# Altium PCB PCBAmpli.PcbDoc
Units mil, origin at the board's own origin, x right, y up, seen from the top; angles counter-clockwise.
Board outline 4500 x 2200 mil, 2 copper layers (Top Layer, Bottom Layer); 43 components, 19 nets, 102 pads, 0 vias.
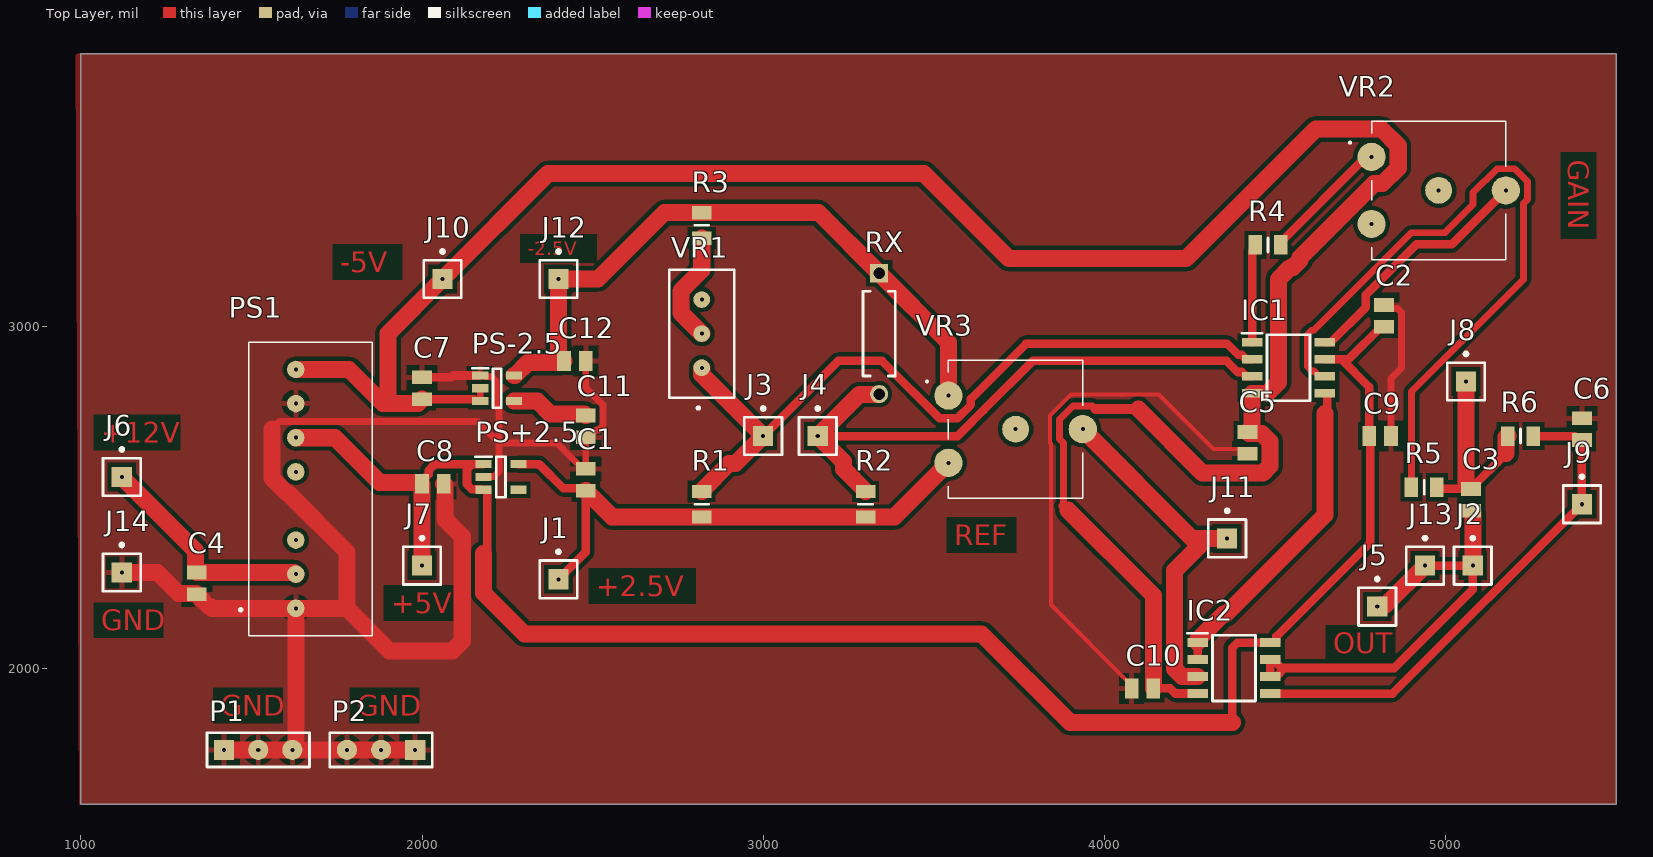
[diagram p0: Top Layer view]
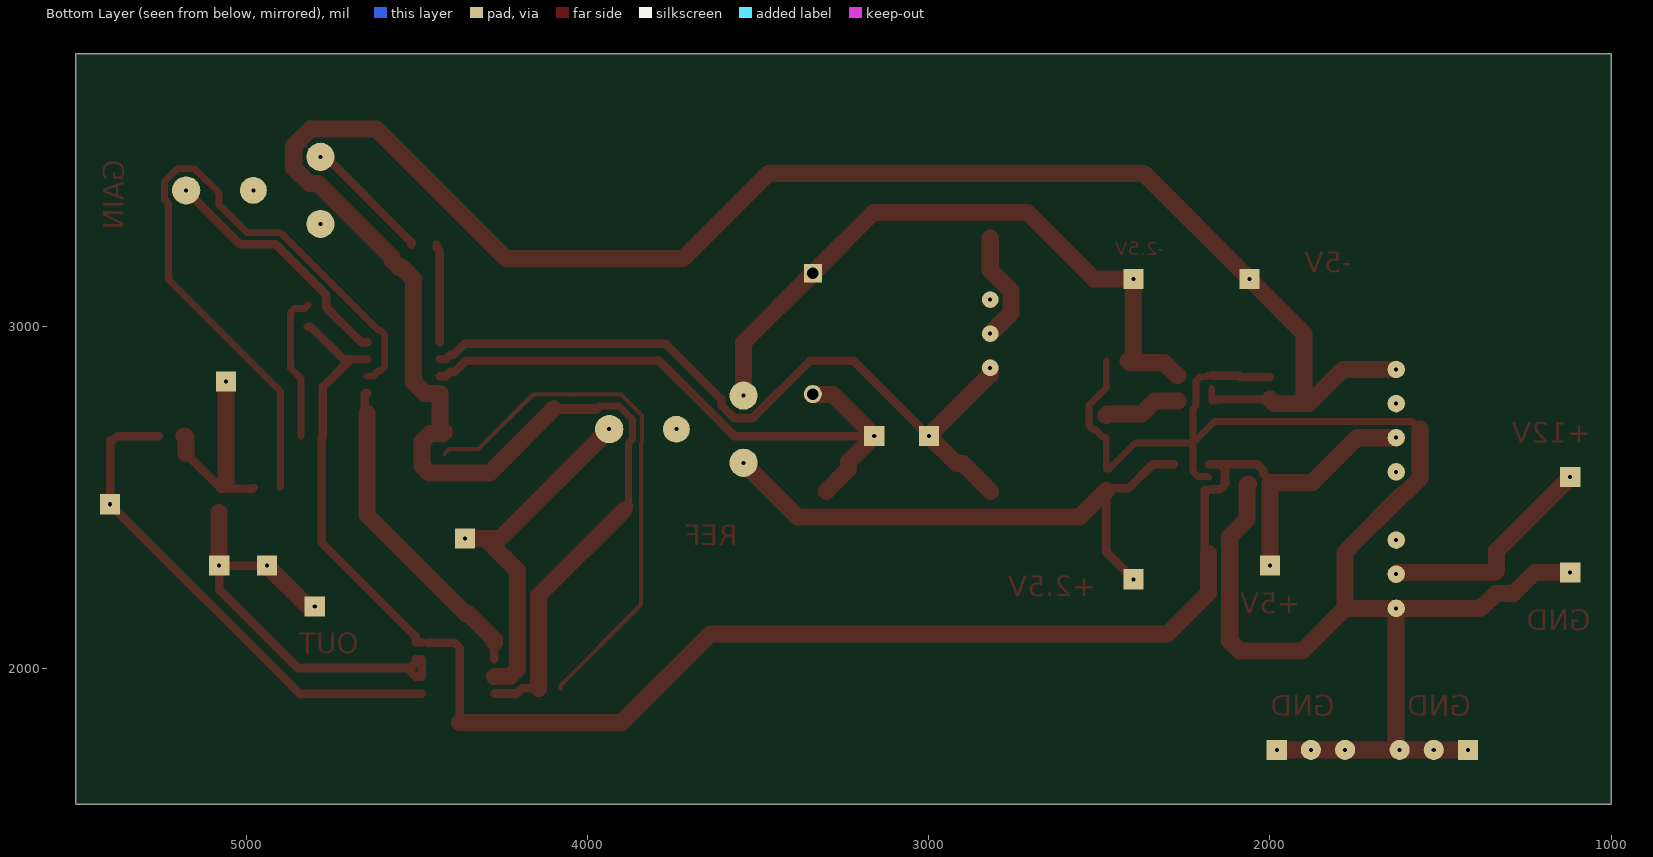
[diagram p1: Bottom Layer view, seen from below]
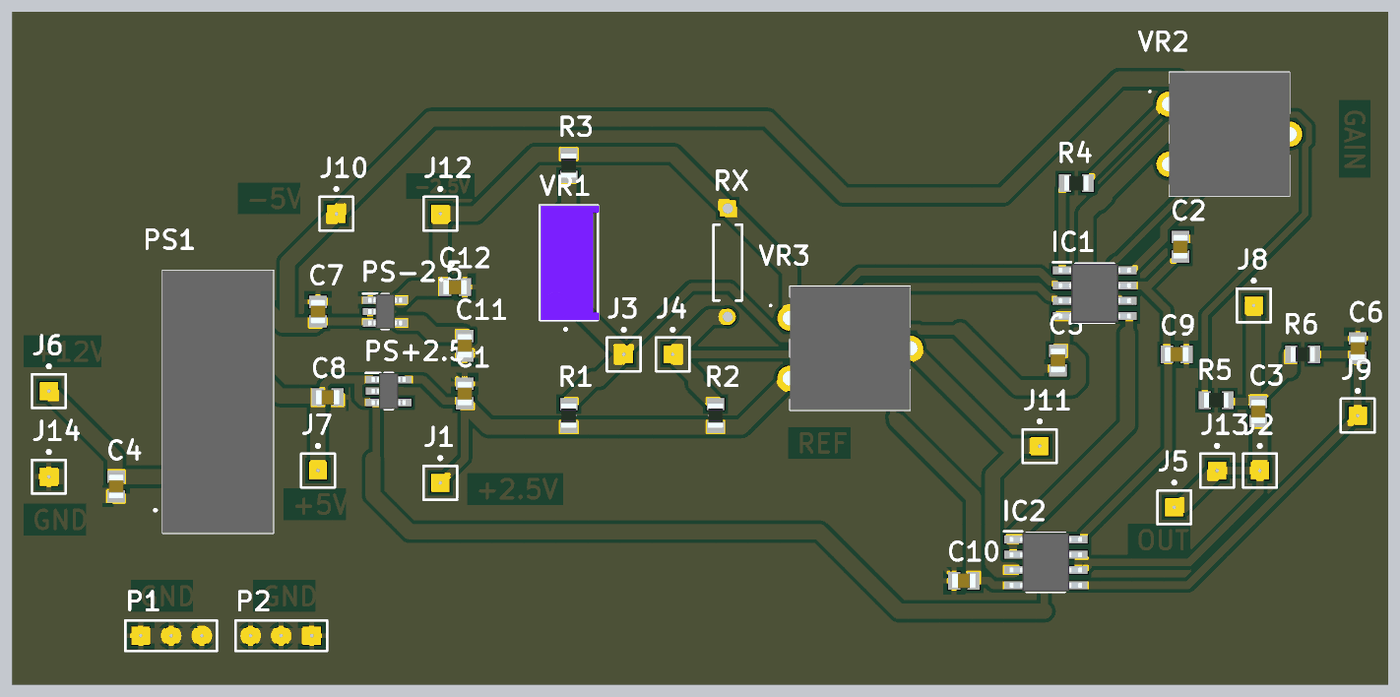
[diagram p2: 3D render of the assembled board from above, using the file's embedded part models]

## Layer stack, top to bottom
Top Solder: solder mask 0.4, Solder Resist, Dk 3.5
Top Layer: signal copper 1.4
Dielectric 1: dielectric 12.6, FR-4, Dk 4.8
Bottom Layer: signal copper 1.4
Bottom Solder: solder mask 0.4, Solder Resist, Dk 3.5

## Board outline
1000,1600 5500,1600 5500,3800 1000,3800

## Design rules (kind name [scope] priority, off if disabled: settings)
Clearance [All] p1: gap=12 ignorepadtopadclearanceinfootprint=FALSE
PlaneConnect [All] p1: planeconnectstyle=Relief reliefexpansion=20 reliefentries=4 reliefconductorwidth=16 reliefairgap=16
PolygonConnect [All] p1: connectstyle=Relief reliefconductorwidth=16 reliefentries=4 polygonreliefangle="90 Angle" airgapwidth=16
RoutingVias [All] p1: holewidth=28 width=50 viastyle="Through Hole" minholewidth=28 minwidth=50 maxholewidth=28 maxwidth=50
SolderMaskExpansion [All] p1: expansion=4 istentingtop=FALSE
Width [All] p1: maxlimit=100 minlimit=10 preferedwidth=25 minimp=50.000000 maximp=50.000000 favimp=50.000000
29 further rules are at their usual default settings.

## Components (designator, comment, footprint, x,y, rotation, side; value= is the part's Value field where it differs from the comment)
C1 "1uF" CAPC2012X94N 2480,2551.89 r270 top
C2 "100nF" CAPC2012X94N 4820,3031.89 r270 top
C3 "330nF" CAPC2012X94N 5075,2493.11 r90 top
C4 "1uF" CAPC2012X94N 1340,2248.11 r270 top
C5 "100nF" CAPC2012X94N 4420,2660 r270 top
C6 "680nF" CAPC2012X94N 5400,2700 r270 top
C7 "2.2uF" CAPC2012X94N 2000,2820 r270 top
C8 "1uF" CAPC2012X94N 2031.89,2540 r180 top
C9 "100nF" CAPC2012X94N 4808.11,2680 r180 top
C10 "100nF" CAPC2012X94N 4111.89,1940 r180 top
C11 "10nF" CAPC2012X94N 2480,2708.11 r90 top
C12 "2.2uF" CAPC2012X94N 2448.11,2900 r180 top
IC1 "AD620ARZ-REEL" SOIC127P600X175-8N 4540,2880 r0 top
IC2 "LM258D" SOIC127P600X175-8N 4380,2000 r0 top
J1 "Socket" PIN1 2400,2260 r0 top
J2 "Socket" PIN1 5080,2300 r0 top
J3 "Socket" PIN1 3000,2680 r0 top
J4 "Socket" PIN1 3160,2680 r0 top
J5 "Socket" PIN1 4800,2180 r0 top
J6 "Socket" PIN1 1120,2560 r0 top
J7 "Socket" PIN1 2000,2300 r0 top
J8 "Socket" PIN1 5060,2840 r0 top
J9 "Socket" PIN1 5400,2480 r0 top
J10 "Socket" PIN1 2060,3140 r0 top
J11 "Socket" PIN1 4360,2380 r0 top
J12 "Socket" PIN1 2400,3140 r0 top
J13 "Socket" PIN1 4940,2300 r0 top
J14 "Socket" PIN1 1120,2280 r0 top
P1 "Header 3" HDR1X3 1420,1760 r0 top
P2 "Header 3" HDR1X3 1980,1760 r180 top
PS1 "IZ1205S" IZ1205S 1630,2175 r90 top
PS+2.5 "AP7331-25WG-7" SOT95P285X130-5N 2231.18,2560 r0 top
PS-2.5 "TPS72325DBVT" SOT95P280X145-5N 2220,2820 r0 top
R1 "120R" RESC2012X65N 2820,2480 r270 top
R2 "120R" RESC2012X65N 3300,2480 r270 top
R3 "115R" RESC2012X65N 2820,3297.4 r270 top
R4 "100R" RESC2012X65N 4480,3240 r0 top
R5 "2800" RESC2012X65N 4937.6,2530 r180 top
R6 "4000" RESC2012X65N 5220,2680 r180 top
RX "" RESA60-630X240 3340,2980 r270 top value=StrainGaugePins
VR1 "Pot_10R" 3296W-1 2820,2980 r90 top
VR2 "220R" PT10LV10473A2020PMS 4783.15,3498.43 r270 top
VR3 "" PT10LV10473A2020PMS 3543.15,2798.43 r270 top

## Footprints (in the part's own frame and the unit in brackets; to place one, negate y for a bottom-side part, rotate by r counter-clockwise, add the part's x,y. Pads: shape width x height; smd on the part's side, far side on the other; paste and mask are expansions set on the pad)
3296W-1 [mm]
  round 1.24 hole 0.3: 1(-2.54,0) 2(0,0) 3(2.54,0)
  silkscreen extent -5.64,-2.41 4.76,2.41, body extent -4.78,-2.48 4.78,2.35, height 11.55
CAPC2012X94N [mm]
  rect 1.02x1.47 smd: 1(-0.81,0) 2(0.81,0)
  body extent -1,-0.63 1,0.63, height 0.94
HDR1X3 [mm] "Connector; Header; 3 Position"
  rect 1.5x1.5 hole 0.3: 1(0,0)
  round 1.5 hole 0.3: 2(2.54,0) 3(5.08,0)
  silkscreen extent -1.27,-1.27 6.35,1.27
IZ1205S [mm]
  round 1.303 hole 0.3: 1(0,0) 2(2.54,0) 3(5.08,0) 5(10.16,0) 6(12.7,0) 7(15.24,0) 8(17.78,0)
  silkscreen extent -2.03,-5.7 19.81,4.2, body extent -2.03,-5.7 19.82,3.5, height 11.2
PIN1 [mm] "Connector; Plug"
  rect 1.5x1.5 hole 0.3: 1(0,0)
  silkscreen extent -1.4,-1.4 1.4,2.17
PT10LV10473A2020PMS [mm]
  round 2.1 hole 0.3: 1(0,0) 2(2.5,10) 3(5,0)
  round 2 hole 0.3 unplated: 4(2.5,5)
  silkscreen extent -2.65,-1.65 7.65,10, body extent -2.65,-0.6 7.65,10.6, height 5.1
RESA60-630X240 [mm] "Axial Resistor, 2-Leads, Dia 2.4mm, Body Length 6.3mm"
  rect 1.35x1.35 hole 0.85: 1(-4.5,0)
  round 1.35 hole 0.85: 2(4.5,0)
  silkscreen extent -3.15,-1.2 3.15,1.2, body extent -4.77,-1.19 4.77,1.2, height 2.4
RESC2012X65N [mm]
  rect 1x1.45 smd: 1(-0.95,0) 2(0.95,0)
  silkscreen extent 0,-0.53 0,0.53, body extent -1,-0.63 1,0.63, height 0.65
SOIC127P600X175-8N [mm]
  rect 1.525x0.65 smd: 1(-2.712,1.905) 2(-2.712,0.635) 3(-2.712,-0.635) 4(-2.712,-1.905) 5(2.712,-1.905) 6(2.712,-0.635) 7(2.712,0.635) 8(2.712,1.905)
  silkscreen extent -3.47,-2.45 1.6,2.58, body extent -3,-2.45 3,2.45, height 1.75
SOT95P280X145-5N [mm]
  rect 1.2x0.6 smd: 1(-1.25,0.95) 2(-1.25,0) 3(-1.25,-0.95) 4(1.25,-0.95) 5(1.25,0.95)
  silkscreen extent -1.85,-1.45 0.3,1.5, body extent -1.4,-1.45 1.4,1.45, height 1.45
SOT95P285X130-5N [mm]
  rect 1.2x0.6 smd: 1(-1.3,0.95) 2(-1.3,0) 3(-1.3,-0.95) 4(1.3,-0.95) 5(1.3,0.95)
  silkscreen extent -1.9,-1.5 0.35,1.5, body extent -1.43,-1.5 1.43,1.5, height 1.3

## Part data
C1 C2 C3 C4 C5 C6 C7 C8 C9 C10 C11 C12: library part 08055A130JAT2A, "Capacitor", Manufacturer_Name=AVX, Mouser Part Number=581-08055A130JAT2A, Datasheet Link=https://componentsearchengine.com/Datasheets/1/06031A100FAT2A.pdf, Height=0.94mm, Manufacturer_Part_Number=08055A130JAT2A, Mouser Price/Stock=https://www.mouser.com/Search/Refine.aspx?Keyword=581-08055A130JAT2A
IC1: "Integrated Circuit", Manufacturer_Name="Analog Devices", Mouser Part Number=584-AD620ARZ-R, Arrow Part Number=AD620ARZ-REEL, Arrow Price/Stock=https://www.arrow.com/en/products/ad620arz-reel/analog-devices, Datasheet Link=http://www.analog.com/media/en/technical-documentation/data-sheets/AD620.pdf, Height=1.75mm, Manufacturer_Part_Number=AD620ARZ-REEL, Mouser Price/Stock=https://www.mouser.co.uk/ProductDetail/Analog-Devices/AD620ARZ-REEL?qs=NmRFExCfTkHbJAB6iFkAaA%3D%3D
IC2: "Integrated Circuit", Manufacturer_Name="Texas Instruments", Mouser Part Number=595-LM258D, Arrow Part Number=LM258D, Arrow Price/Stock=https://www.arrow.com/en/products/lm258d/texas-instruments, Datasheet Link=https://www.ti.com/lit/ds/symlink/lm358ba.pdf?ts=1593158783808&ref_url=https%253A%252F%252Fwww.ti.com%252Fsitesearch%252Fdocs%252Funiversalsearch.tsp%253FsearchTerm%253DLM258D, Height=1.75mm, Manufacturer_Part_Number=LM258D, Mouser Price/Stock=https://www.mouser.co.uk/ProductDetail/Texas-Instruments/LM258D?qs=afYny40WCj3%252BQVZnkBXQ5Q%3D%3D
P1 P2: "Header, 3-Pin", LatestRevisionDate=17-Jul-2002, LatestRevisionNote="Re-released for DXP Platform.", Publisher="Altium Limited"
PS1: "Power Supply", Manufacturer_Name="XP POWER", Mouser Part Number=209-IZ1205S, Datasheet Link=https://www.xppower.com/portals/0/pdfs/SF_IZ.pdf, Height=11.1mm, Manufacturer_Part_Number=IZ1205S, Mouser Price/Stock=https://www.mouser.co.uk/ProductDetail/XP-Power/IZ1205S?qs=w%2Fv1CP2dgqrcXpexIyZ%252BMg%3D%3D
PS+2.5: library part AP7331-33WG-7, "Power Supply", Manufacturer_Name="Diodes Inc.", Mouser Part Number=621-AP7331-33WG-7, Arrow Part Number=AP7331-33WG-7, Arrow Price/Stock=https://www.arrow.com/en/products/ap7331-33wg-7/diodes-incorporated, Datasheet Link=http://uk.rs-online.com/web/p/products/1219606, Height=1.3mm, Manufacturer_Part_Number=AP7331-33WG-7, Mouser Price/Stock=https://www.mouser.co.uk/ProductDetail/Diodes-Incorporated/AP7331-33WG-7?qs=vIZ3oKQCLxrSho%2FIWbe2%252BQ%3D%3D
PS-2.5: "Integrated Circuit", Manufacturer_Name="Texas Instruments", Mouser Part Number=595-TPS72325DBVT, Arrow Part Number=TPS72325DBVT, Arrow Price/Stock=https://www.arrow.com/en/products/tps72325dbvt/texas-instruments, Datasheet Link=http://www.ti.com/general/docs/lit/getliterature.tsp?genericPartNumber=TPS723&fileType=pdf, Height=1.45mm, Manufacturer_Part_Number=TPS72325DBVT, Mouser Price/Stock=https://www.mouser.co.uk/ProductDetail/Texas-Instruments/TPS72325DBVT/?qs=6zVL%252ByCp0mqucRjl8KaDcw%3D%3D
R1 R2 R3 R4 R5 R6: library part CRG0805F100K, "Resistor", Manufacturer_Name="TE Connectivity", Mouser Part Number=279-CRG0805F100K, Arrow Part Number=CRG0805F100K, Arrow Price/Stock=https://www.arrow.com/en/products/crg0805f100k/te-connectivity, Datasheet Link=http://www.te.com/commerce/DocumentDelivery/DDEController?Action=showdoc&DocId=Customer+Drawing%7F1623109%7FBA%7Fpdf%7FEnglish%7FENG_CD_1623109_BA.pdf%7F1623109-1, Height=0.65mm, Manufacturer_Part_Number=CRG0805F100K, Mouser Price/Stock=https://www.mouser.co.uk/ProductDetail/TE-Connectivity-Neohm/CRG0805F100K?qs=VHcS2MTj4gaSH6styLNYqg%3D%3D
RX: library part CMP-009-00045-3, "Axial Resistor, 100 KOhm, +/- 1%, 0.25 W, -55 to 155 degC, 2-Pin THD, RoHS, Bulk", Case/Package=Axial, Manufacturer=Yageo, Max Operating Temperature=155°C, Min Operating Temperature=-55°C, Package Description="2-Pin Axial Lead, Dia 2.4 mm, Body Length 6.3 mm", Package Quantity=200, Package Reference=MFR-25, Power=250mW, Tolerance=1%, Voltage Rating=250V, Datasheet URL=http://www.yageo.com/documents/recent/Yageo%20LR_MFR_2013.pdf, Datasheet Version=Apr-13, Manufacturer URL=http://www.yageo.com/, Mounting Technology=TH, Packaging=Bulk, RoHS Compliant=True
VR1: library part 3296W-1-103LF, "Variable Resistor", Manufacturer_Name=Bourns, Mouser Part Number=652-3296W-1-103LF, Arrow Part Number=3296W-1-103LF, Arrow Price/Stock=https://www.arrow.com/en/products/3296w-1-103lf/bourns?region=europe, Datasheet Link=https://www.bourns.com/pdfs/3296.pdf, Manufacturer_Part_Number=3296W-1-103LF, Mouser Price/Stock=https://www.mouser.co.uk/ProductDetail/Bourns/3296W-1-103LF?qs=CL3xLxiry19Id6AEaxYcng%3D%3D
VR2 VR3: library part PT10LV10-103A2020, "Variable Resistor", Manufacturer_Name=PIHER, Mouser Part Number=531-PT10V-10K, Arrow Part Number=PT10LV10-103A2020, Arrow Price/Stock=https://www.arrow.com/en/products/pt10lv10-103a2020/piher, Datasheet Link=https://www.piher.net/pdf/12-PT10v03.pdf, Height=5mm, Manufacturer_Part_Number=PT10LV10-103A2020, Mouser Price/Stock=https://www.mouser.co.uk/ProductDetail/Amphenol-Piher/PT10LV10-103A2020?qs=PZ1ub9NEDaWrX8IHli%2FVDQ%3D%3D
J1 J2 J3 J4 J5 J6 J7 J8 J9 J10 J11 J12 J13 J14: LatestRevisionDate=17-Jul-2002, LatestRevisionNote="Re-released for DXP Platform.", Publisher="Altium Limited"

## Nets (pads, with @x,y where several pads share a name; then routed paths per layer and width w, separated by ;. In a path a pad name is that pad's centre, name@x,y a point inside that pad or via, vN(x,y) a via of type N, cw(c..) or ccw(c..) an arc to the next point about the centre after c; other vN are vias at no path point)
+2.5: C1.2 J1.1 PS+2.5.5 R1.2 R2.2 VR3.3 | length 1683.5
  Top Layer w25: PS+2.5.5 2343.61,2597.4 2413.56,2527.45 2472.55,2527.45 C1.2 ; J1.1 2480,2340 C1.2@2480,2519.02
  Top Layer w50: C1.2 2480,2519.02 2483.94,2515.08 2484.92,2515.08 2557.4,2442.6 R1.2 R2.2 3384.17,2442.6 VR3.3
+5: C2.2 C8.2 C9.2 IC1.7 IC2.8 J7.1 PS1.6 PS+2.5.1 PS+2.5.3 | length 5222.9
  Top Layer w15: C9.2 C9.2@4780,2676.22
  Top Layer w25: C8.2 2000,2548.86 2019.2,2568.06 2019.2,2579.09 2037.52,2597.4 PS+2.5.1 2179.31,2596.71 2146.63,2596.71 2131.88,2581.96 2131.88,2538.04 2146.23,2523.69 2168.48,2523.69 2169.57,2522.6 PS+2.5.3 ; 2180,2336.1 2191.12,2347.22 PS+2.5.3@2191.12,2521.91 ; 4375.29,1840 4375.29,2060.06 4389.93,2074.7 IC2.8@4469.25,2074.7 ; IC2.8 4504,2075 4504.29,2075.3 4504.29,2092.52 4780,2368.23 4780,2424.19 4780,2635.81 C9.2@4780,2676.22 ; IC1.7 4695,2905 ; C9.2 4776.22,2823.78 4695,2905 ; C2.2 4811.14,3000 4716.14,2905 4695,2905
  Top Layer w50: PS1.6 1745,2675 1876.06,2543.94 1996.06,2543.94 C8.2 J7.1 ; 2180,2336.1 2180,2220 2300,2100 3640,2100 3900,1840 4375.29,1840
+12: C4.1 J6.1 PS1.2 | length 663.2
  Top Layer w50: J6.1 1336.06,2343.94 1336.06,2283.94 C4.1 1624.65,2280 1629.65,2275 PS1.2
-2.5: C12.2 J12.1 PS-2.5.5 R3.1 RX.1 VR3.1 | length 1949.1
  Top Layer w50: PS-2.5.5 2272.64,2857.4 2311.3,2896.06 2412.28,2896.06 C12.2 2415.24,2900 2400,2915.24 J12.1 2515.75,3140 2710.55,3334.8 R3.1 3162.36,3334.8 RX.1 3543.15,2954.02 VR3.1
-5: C5.1 C7.2 C10.1 IC1.4 IC2.4 J10.1 PS1.8 PS-2.5.2 PS-2.5.3 | length 7242.1
  Top Layer w20: PS-2.5.3@2153.46,2788.11 2158.98,2782.6 PS-2.5.3 PS-2.5.2 ; 3880.76,2475.2 3880.76,2659.45 3868.51,2671.69 3868.51,2728.31 3908.54,2768.34 3965.16,2768.34 3974.33,2759.17
  Top Layer w25: C7.2 PS-2.5.3@2153.46,2788.11 ; C10.1 4193.08,1940 4207.79,1925.3 4272.93,1925.3 IC2.4
  Top Layer w30: 3880.76,2475.2 3893,2462.95 ; 3974.33,2759.17 4099.85,2759.17
  Top Layer w50: PS1.8 1786,2875 1886,2775 1900,2775 ; C7.2 2000,2787.13 1987.87,2775 1900,2775 ; 3893,2462.95 4143.78,2212.18 C10.1 ; 4099.85,2759.17 4287.99,2571.03 4464.26,2571.03 4485.94,2592.71 4485.94,2663.51 4462.48,2686.97 4423.94,2686.97 C5.1@4420,2690.91 ; C5.1@4420,2692.87 4433.23,2706.1 IC1.4 ; IC1.4@4438.25,2805.2 4478.57,2805.2 4510,2836.63 4510,3139.21 4545.24,3174.46 4552.41,3174.46 4574.09,3196.13 4574.09,3203.3 4790.87,3420.09 4815.6,3420.09 4861.49,3465.98 4861.49,3530.87 4812.36,3580 4620,3580 4240,3200 3720,3200 3470,3450 2370,3450 J10.1 1900,2980 1900,2775
GND: C1.1 C2.1 C4.2 C5.2 C6.1 C7.1 C8.1 C9.1 C10.2 C11.1 C12.1 J14.1 P1.1 P1.2 P1.3 P2.1 P2.2 P2.3 PS1.1 PS1.7 PS+2.5.2 PS-2.5.1 | length 7100
  Top Layer w12: C10.2 4080,1948.86 3843.38,2185.47 3843.38,2657.22 3840.51,2660.1 3840.51,2739.9 3901.95,2801.34 4048.66,2801.34 4050,2800 4052.17,2802.17 4159.56,2802.17 4319.54,2642.19 4405.92,2642.19 C5.2
  Top Layer w20: 1560,2700 1582.65,2722.65 2162.97,2722.65 2225.62,2660 ; PS-2.5.1 2182.6,2857.4 2186.19,2853.81 2203.52,2853.81 2216.41,2840.92 2216.41,2768.86 2225.62,2759.64 2225.62,2660 ; PS+2.5.2 2181.81,2561.81 2210.96,2561.81 2225.62,2576.48 2225.62,2660 ; C12.1 2480,2821.4 2530.94,2770.47 2530.94,2710.81 2518.05,2697.92 2510.56,2697.92 2488.86,2676.22 C11.1 C1.1 2471.14,2583.78 2394.92,2660 2225.62,2660 ; C2.1 4830.08,3053.7 4859.22,3053.7 4870.94,3041.99 4870.94,2879.53 4840,2848.6 C9.1
  Top Layer w25: C7.1 2085.64,2851.89 2091.15,2857.4 PS-2.5.1
  Top Layer w50: J14.1 1224.53,2280 1286.53,2218 1338.22,2218 C4.2 1340,2215.24 1375.24,2180 1380,2180 1385,2175 PS1.1 ; P1.1 P1.2 P1.3 ; 1560,2700 1560,2556.4 1604.05,2512.35 1607.65,2512.35 1780,2340 1780,2175 ; P2.1 P2.2 P2.3 P1.3 ; C8.1 2067.62,2536.16 2067.62,2436.06 2118,2385.68 2118,2079.29 2088.71,2050 1905,2050 1780,2175 ; P1.3 1620,1762.45 1630,1772.45 PS1.1 ; PS1.1 1780,2175
NetC3_1: C3.1 IC2.6 IC2.7 J2.1 J5.1 J13.1 | length 1366.2
  Top Layer w25: J13.1 J2.1 5080,2230 4850,2000 4518.94,2000 ; C3.1 5075,2460.24 C3.1@5080,2455.24 ; 4518.94,2000 4504.29,2014.64 4504.29,2024.7 4504,2025 IC2.7 IC2.6 4504,1975 4518.94,1989.94 4518.94,2000
  Top Layer w50: J5.1 4804.53,2184.53 4824.53,2184.53 J13.1 ; J2.1 C3.1@5080,2455.24
NetC3_2: C3.2 J8.1 R5.1 R6.2 | length 626
  Top Layer w10: R5.1 R5.1@4976.77,2530
  Top Layer w20: R5.1@4976.77,2530 R5.1@4981.77,2525
  Top Layer w25: R5.1@4981.77,2525 5040,2525 ; C3.2@5060,2545 5040,2525 ; 5177.28,2628.27 5075,2525.98 C3.2 5040,2525
  Top Layer w50: C3.2@5060,2545 J8.1 ; 5177.28,2628.27 5177.28,2676.46 5180.83,2680 R6.2
NetC6_2: C6.2 IC2.5 J9.1 R6.1 | length 1478.8
  Top Layer w25: IC2.5 4845,1925 J9.1 C6.2 5391.14,2668.11 5379.25,2680 R6.1
NetC11_2: C11.2 PS-2.5.4 | length 229
  Top Layer w50: PS-2.5.4 2338.39,2782.6 2376.06,2744.92 2476.06,2744.92 2480,2740.98 C11.2
NetIC1_1: IC1.1 R4.1 | length 288.9
  Top Layer w25: IC1.1 4433.23,3221.77 4442.6,3231.14 R4.1
NetIC1_2: IC1.2 J3.1 R1.1 VR1.1 | length 2235.8
  Top Layer w25: J3.1 3220,2900 3348.47,2900 3515.88,2732.59 3570.42,2732.59 3608.99,2771.15 3608.99,2788.99 3770,2950 4360.77,2950 4393.06,2917.7 4403.3,2917.7 4415.71,2905.3 4432.93,2905.3 IC1.2
  Top Layer w50: R1.1 2820,2519.17 2899.92,2599.09 2919.09,2599.09 J3.1 2820,2860 VR1.1
NetIC1_3: IC1.3 J4.1 R2.1 RX.2 | length 1834.5
  Top Layer w25: J4.1 3570.16,2680 3585.75,2695.59 3646.16,2756 3790.16,2900 4358.44,2900 4390.73,2867.7 4403.3,2867.7 4416,2855 IC1.3
  Top Layer w50: R2.1 3300,2519.17 3235.24,2583.93 3235.24,2604.76 J4.1 3282.23,2802.23 3339.4,2802.23 RX.2
NetIC1_5: IC1.5 IC2.1 IC2.2 | length 947.9
  Top Layer w25: IC2.2 IC2.1 ; 4646.46,2746.46 4653.23,2753.23 4653.23,2804.7 4652.93,2805 IC1.5
  Top Layer w50: IC2.1 4273.23,2082.18 4349.04,2158 4356.23,2158 4646.46,2448.23 4646.46,2746.46
NetIC1_6: IC1.6 R5.2 | length 2077.4
  Top Layer w20: IC1.6 4629.55,2855 4614.34,2870.2 4607.64,2870.2 4594.75,2883.09 4594.75,2976.91 4607.64,2989.8 4613.56,2989.8 4899.75,3275.99 4998.45,3275.99 5080.74,3358.27 5080.74,3393.46 5150.61,3463.34 5203.09,3463.34 5240.19,3426.24 5240.19,3373.76 5228.21,3361.79 5228.21,3138.21 4900.2,2810.2 R5.2
NetIC1_8: IC1.8 VR2.2 | length 735.7
  Top Layer w25: IC1.8 4647.07,2955.3 4664.29,2955.3 4766.56,3057.57 4766.56,3094.01 4914.04,3241.49 5018.34,3241.49 VR2.2
NetIC2_3: IC2.3 J11.1 VR3.2 | length 1053.8
  Top Layer w50: VR3.2 4256.85,2380 4300,2380 ; IC2.3 4273.02,1975.2 4227.88,1975.2 4206.21,1996.88 4206.21,2286.21 4300,2380 ; J11.1 4300,2380
NetR3_2: R3.2 VR1.2 | length 330.9
  Top Layer w50: VR1.2 2758.59,3041.41 2758.59,3105.44 2820,3166.85 R3.2
NetR4_2: R4.2 VR2.1 | length 378
  Top Layer w25: R4.2 4517.4,3248.86 4755.93,3487.39 4772.11,3487.39 VR2.1
pads on no net: PS1.3 PS1.5 PS+2.5.4 VR1.3 VR2.3 VR2.4 VR3.4

## Polygon pours and split planes (outlines as drawn)
GND on Top Layer "GND_L01_P000" (solid, pour order 0): 985.53,3800 5500,3800 5500,1600 994.59,1600

## Other copper
Top Layer:
  text "GAIN" at 5360,3490 h60 r270
  text "-2.5V" at 2310,3210 h40
  text "-5V" at 1760,3160 h60
  text "+12V" at 1060,2660 h60
  text "REF" at 3560,2360 h60
  text "+2.5V" at 2510,2210 h60
  text "+5V" at 1910,2160 h60
  text "GND" at 1060,2110 h60
  text "OUT" at 4670.36,2043.58 h60
  text "GND" at 1410,1860 h60
  text "GND" at 1810,1860 h60